# Altium PCB Quadruped_ShieldPCB.PcbDoc
Units mil, origin at the board's own origin, x right, y up, seen from the top; angles counter-clockwise.
Board outline 6290 x 3672.85 mil, 2 copper layers (Top Layer, Bottom Layer); 49 components, 68 nets, 491 pads, 53 vias.
Unrouted connection lines stored in the file: 4.
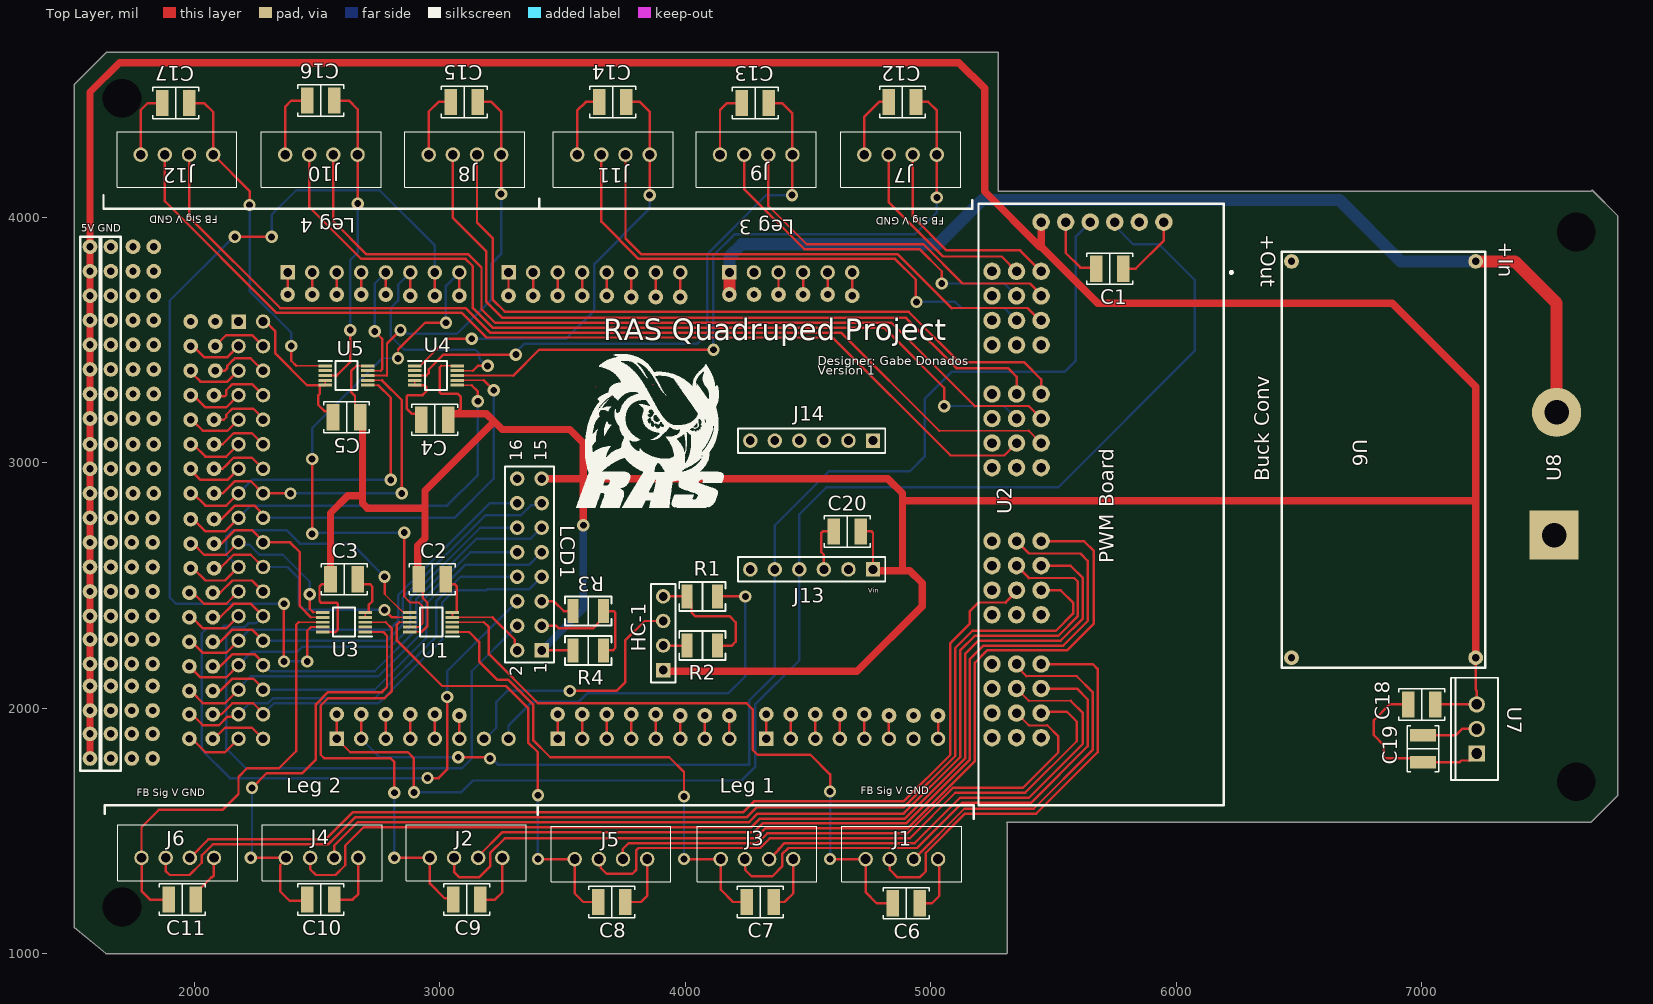
[diagram p0: Top Layer view]
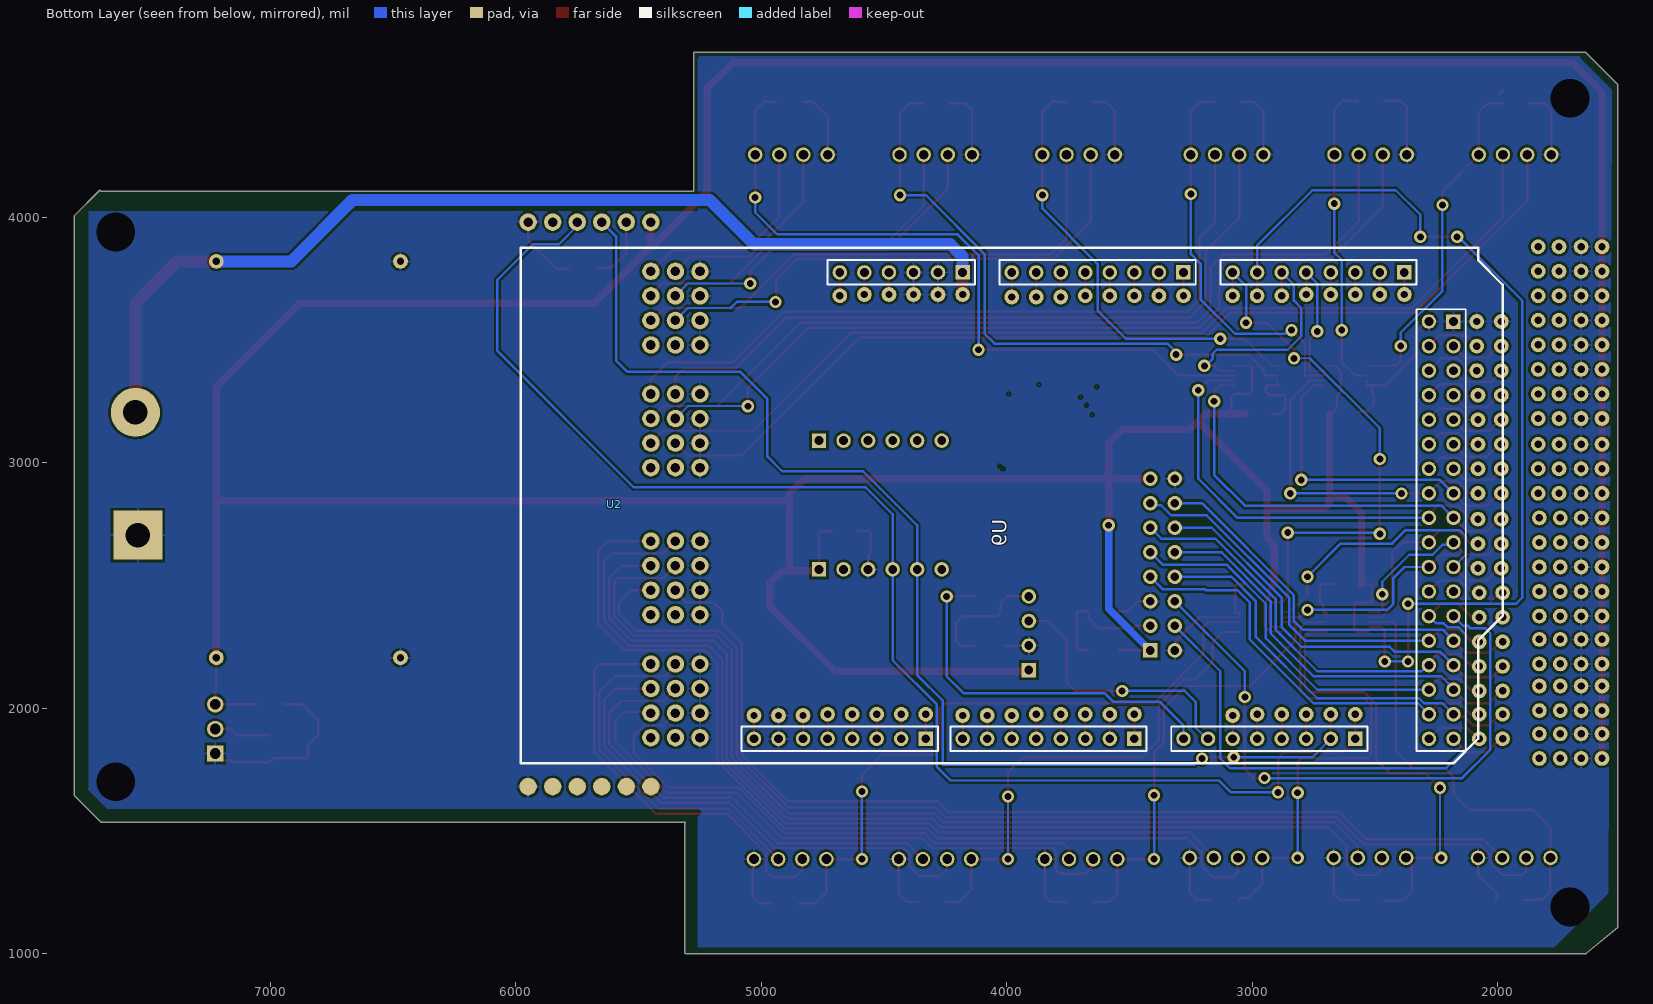
[diagram p1: Bottom Layer view, seen from below]
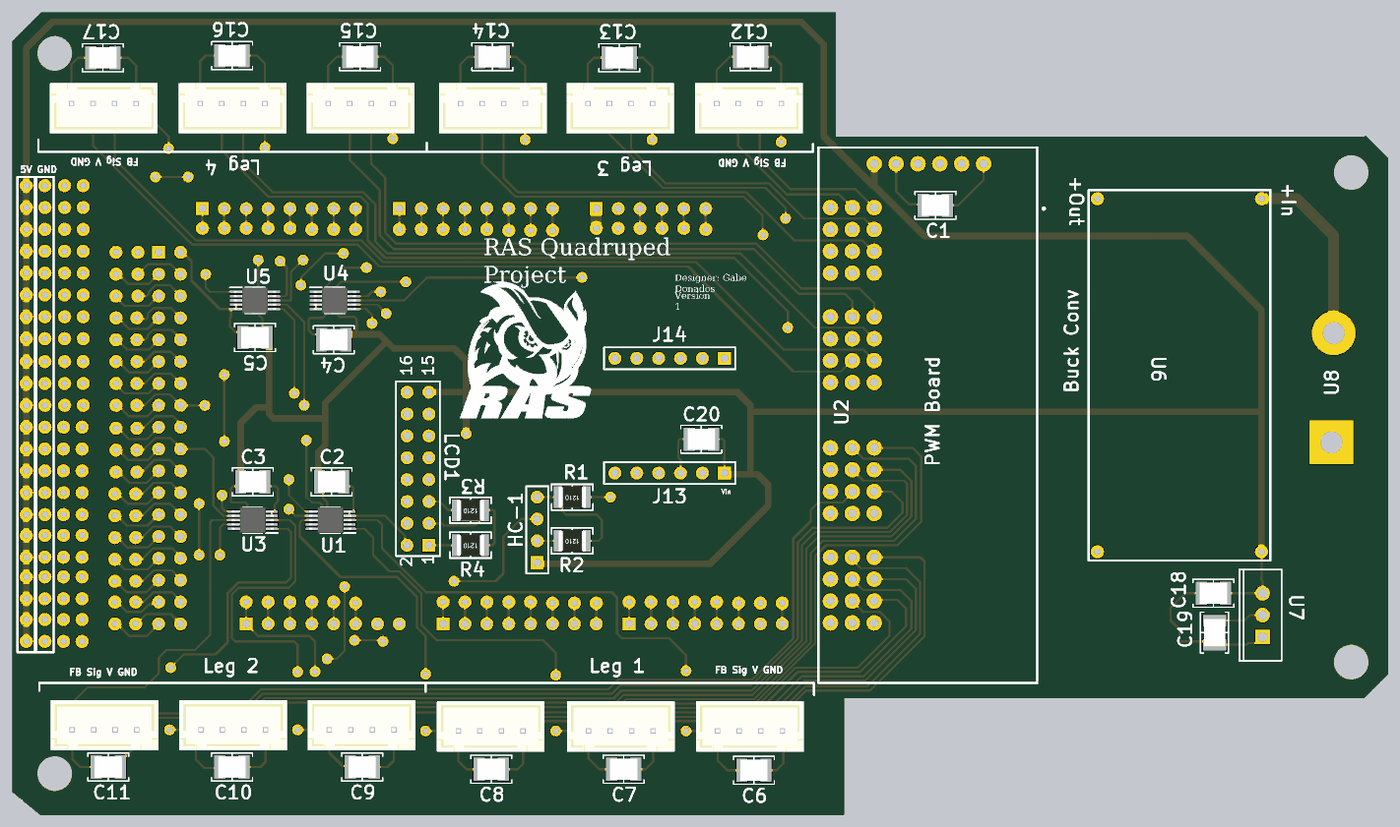
[diagram p2: 3D render of the assembled board from above, using the file's embedded part models]

## Layer stack, top to bottom
Top Solder: solder mask 0.4, Solder Resist, Dk 3.5
Top Layer: signal copper 1.4
Dielectric 1: dielectric 12.6, FR-4, Dk 4.8
Bottom Layer: signal copper 1.4
Bottom Solder: solder mask 0.4, Solder Resist, Dk 3.5

## Board outline
1510,4540 1642.85,4672.85 5275,4672.85 5275,4105 7690,4105 7695,4110 7800,4005 7800,1645 7690,1535 5310,1535 5312.35,1532.65 5312.35,1003.35 5310,1000 1640,1000 1510,1106.67 1510,1270

## Design rules (kind name [scope] priority, off if disabled: settings)
Clearance [All] p1: gap=10 ignorepadtopadclearanceinfootprint=TRUE except(0: Arc-Hole Track-Hole SMDPad-Hole THPad-Hole Via-Hole Fill-Hole Poly-Hole Region-Hole Text-Hole)
ComponentClearance [All] p1: gap=5 collisioncheckmode=3 verticalgap=0 showdistances=FALSE donotcheckwithout3dbody=TRUE
NetAntennae [All] p1: netantennaetolerance=5000
PolygonConnect [All] p1: connectstyle=Relief reliefconductorwidth=10 reliefentries=4 polygonreliefangle="90 Angle" airgapwidth=10
RoomDefinition U_HC06_Schem [InComponentClass('U_HC06_Schem')] p1: confinementstyle=ConfineIn formatcopy=TRUE lockcomponents=FALSE outline 3765,2060 4275,2060 4275,2565 3765,2565
RoomDefinition U_LCD_Schem [InComponentClass('U_LCD_Schem')] p2: confinementstyle=ConfineIn formatcopy=TRUE lockcomponents=FALSE outline 3135,2100 3735,2100 3735,3090 3135,3090
RoomDefinition U_Power_Circuit [InComponentClass('U_Power_Circuit')] p3: confinementstyle=ConfineIn formatcopy=TRUE lockcomponents=FALSE outline 7730.24,1655 7730.24,3995 6290.24,3995 6290.24,1655
RoutingVias [All] p1: holewidth=28 width=50 viastyle="Through Hole" minholewidth=28 minwidth=50 maxholewidth=28 maxwidth=50
ShortCircuit [All] p1: allowed=TRUE
SilkToSolderMaskClearance [IsText] p1: minsilkscreentomaskgap=5 clearancetoexposedcopper=TRUE
SolderMaskExpansion [All] p1: expansion=4 istentingtop=FALSE
UnRoutedNet [All] p1: checkbadconnections=TRUE
Width [All] p1: maxlimit=50 minlimit=5 preferedwidth=10
25 further rules are at their usual default settings.

## Classes and differential pairs
component class U_PWM_BoardSchem: C1 C2 C3 C4 C5 C6 C7 C8 C9 C10 C11 C12 C13 C14 C15 C16 C17 J1 J2 J3 J4 J5 J6 J7 J8 J9 J10 J11 J12 U1 U2 U3 U4 U5
component class U_Power_Circuit: C18 C19 U6 U7 U8
component class U_MPU_Schem: C20 J13 J14
component class U_LCD_Schem: LCD1 R3 R4
component class U_HC06_Schem: HC-1 R1 R2
component class Main_Board: U9

## Components (designator, comment, footprint, x,y, rotation, side; value= is the part's Value field where it differs from the comment)
C1 "0.1 µF" "CAP 1210_3225 - 1MM" 5730,3790 r180 top
C2 "0.1 µF" "CAP 1210_3225 - 1MM" 2970,2525 r180 top
C3 "0.1 µF" "CAP 1210_3225 - 1MM" 2610,2525 r180 top
C4 "0.1 µF" "CAP 1210_3225 - 1MM" 2980,3175 r0 top
C5 "0.1 µF" "CAP 1210_3225 - 1MM" 2620,3185 r0 top
C6 "0.1 µF" "CAP 1210_3225 - 1MM" 4900,1205 r180 top
C7 "0.1 µF" "CAP 1210_3225 - 1MM" 4305,1210 r180 top
C8 "0.1 µF" "CAP 1210_3225 - 1MM" 3700,1210 r180 top
C9 "0.1 µF" "CAP 1210_3225 - 1MM" 3110,1220 r180 top
C10 "0.1 µF" "CAP 1210_3225 - 1MM" 2515,1220 r180 top
C11 "0.1 µF" "CAP 1210_3225 - 1MM" 1950,1220 r180 top
C12 "0.1 µF" "CAP 1210_3225 - 1MM" 4885,4470 r0 top
C13 "0.1 µF" "CAP 1210_3225 - 1MM" 4285,4465 r0 top
C14 "0.1 µF" "CAP 1210_3225 - 1MM" 3705,4470 r0 top
C15 "0.1 µF" "CAP 1210_3225 - 1MM" 3100,4470 r0 top
C16 "0.1 µF" "CAP 1210_3225 - 1MM" 2515,4475 r0 top
C17 "0.1 µF" "CAP 1210_3225 - 1MM" 1925,4465 r0 top
C18 "0.33 µF" "CAP 1210_3225 - 1MM" 7000.12,2015 r0 top
C19 "0.1 µF" "CAP 1210_3225 - 1MM" 7005.24,1835 r90 top
C20 "0.1 µF" "CAP 1210_3225 - 1MM" 4660,2720 r0 top
HC-1 "Header 4" HDR1X4 3910,2155 r90 top
J1 "B4B-XH-A_LF__SN_" B4BXHALFSN 4734.72,1385 r0 top
J2 "B4B-XH-A_LF__SN_" B4BXHALFSN 2959.72,1390 r0 top
J3 "B4B-XH-A_LF__SN_" B4BXHALFSN 4144.72,1385 r0 top
J4 "B4B-XH-A_LF__SN_" B4BXHALFSN 2373.15,1390 r0 top
J5 "B4B-XH-A_LF__SN_" B4BXHALFSN 3549.72,1385 r0 top
J6 "B4B-XH-A_LF__SN_" B4BXHALFSN 1784.72,1390 r0 top
J7 "B4B-XH-A_LF__SN_" B4BXHALFSN 5025.28,4255 r180 top
J8 "B4B-XH-A_LF__SN_" B4BXHALFSN 3250,4255 r180 top
J9 "B4B-XH-A_LF__SN_" B4BXHALFSN 4436.85,4255 r180 top
J10 "B4B-XH-A_LF__SN_" B4BXHALFSN 2665,4255 r180 top
J11 "B4B-XH-A_LF__SN_" B4BXHALFSN 3855,4255 r180 top
J12 "B4B-XH-A_LF__SN_" B4BXHALFSN 2076.85,4255 r180 top
J13 "" HDR1X6 4765,2565 r180 top
J14 "" HDR1X6 4765,3090 r180 top
LCD1 "Header 8X2" HDR2X8 3415,2235 r90 top
R1 "1 kOhms" "RES 1210_3225" 4070,2455 r180 top
R2 "1 kOhms" "RES 1210_3225" 4070,2255 r180 top
R3 "1 kOhms" "RES 1210_3225" 3605,2395 r180 top
R4 "47 kOhms" "RES 1210_3225" 3605,2235 r180 top
U1 "MAX4524LEUB+" SOP50P490X110-10N 2965,2350 r180 top
U2 "815" 815 5194.88,4055.2 r270 top
U3 "MAX4524LEUB+" SOP50P490X110-10N 2610,2350 r180 top
U4 "MAX4524LEUB+" SOP50P490X110-10N 2985,3355 r0 top
U5 "MAX4524LEUB+" SOP50P490X110-10N 2620,3355 r0 top
U6 "DC-DC Buck Converter Breakout" "DC-DC Buck Converter Breakout-Footprint-1" 6635.24,3045 r270 top
U7 "LD1117" "PCB - LEADED - TO - TO-220" 7225,1915 r180 top
U8 "3S LiPo Input" "3S LiPo Input-Footprint-2" 7545,2955 r90 top
U9 "ARDUINO MEGA" "ARDUINO MEGA" 3880,2775 r180 bottom locked

## Footprints (in the part's own frame and the unit in brackets; to place one, negate y for a bottom-side part, rotate by r counter-clockwise, add the part's x,y. Pads: shape width x height; smd on the part's side, far side on the other; paste and mask are expansions set on the pad)
"3S LiPo Input-Footprint-2" [mil]
  round 200 hole 100: 1(250,-5)
  rect 200x200 hole 100: 2(-250,5)
815 [mm]
  round 1.8 hole 1: 1(7,6.48) 2(9.54,6.48) 3(12.08,6.48) 4(14.62,6.48) 5(19.7,6.48) 6(22.24,6.48) 7(24.78,6.48) 8(27.32,6.48) 9(34.92,6.48) 10(37.46,6.48) 11(40,6.48) 12(42.54,6.48) 13(47.64,6.48) 14(50.18,6.48) 15(52.72,6.48) 16(55.26,6.48) 17(7,3.94) 18(9.54,3.94) 19(12.08,3.94) 20(14.62,3.94) 21(19.7,3.94) 22(22.24,3.94) 23(24.78,3.94) 24(27.32,3.94) 25(34.92,3.94) 26(37.46,3.94) 27(40,3.94) 28(42.54,3.94) 29(47.64,3.94) 30(50.18,3.94) 31(52.72,3.94) 32(55.26,3.94) 33(7,1.4) 34(9.54,1.4) 35(12.08,1.4) 36(14.62,1.4) 37(19.7,1.4) 38(22.24,1.4) 39(24.78,1.4) 40(27.32,1.4) 41(34.92,1.4) 42(37.46,1.4) 43(40,1.4) 44(42.54,1.4) 45(47.64,1.4) 46(50.18,1.4) 47(52.72,1.4) 48(55.26,1.4) 49(1.91,6.48) 50(1.91,9.02) 51(1.91,11.56) 52(1.91,14.1) 53(1.91,16.64) 54(1.91,19.18)
  round 1.8 smd far side: 55(60.33,6.48) 56(60.33,9.02) 57(60.33,11.56) 58(60.33,14.1) 59(60.33,16.64) 60(60.33,19.18)
  silkscreen extent 0,0 62.24,26.29
"ARDUINO MEGA" [mm] "Arduino Mega 2560"
  rect 1.5x1.5 hole 0.9: 0(10.16,-22.86) 8(-11.43,-22.86) 21(33.02,-22.86) 59(-7.62,25.4) 67(15.24,25.4) 75(38.1,25.4) 79(43.18,20.32)
  round 1.5 hole 0.9: 1(7.62,-22.86) 2(5.08,-22.86) 3(2.54,-22.86) 4(0,-22.86) 5(-2.54,-22.86) 6(-5.08,-22.86) 7(-7.62,-22.86) 9(-13.97,-22.86) 10(-16.51,-22.86) 11(-19.05,-22.86) 12(-21.59,-22.86) 13(-24.13,-22.86) 14(15.24,-22.86) 15(17.78,-22.86) 16(20.32,-22.86) 17(22.86,-22.86) 18(25.4,-22.86) 19(27.94,-22.86) 20(30.48,-22.86) 22(40.64,-20.32) 23(43.18,-20.32) 24(40.64,-17.78) 25(43.18,-17.78) 26(40.64,-15.24) 27(43.18,-15.24) 28(40.64,-12.7) 29(43.18,-12.7) 30(40.64,-10.16) 31(43.18,-10.16) 32(40.64,-7.62) 33(43.18,-7.62) 34(40.64,-5.08) 35(43.18,-5.08) 36(40.64,-2.54) 37(43.18,-2.54) 38(40.64,0) 39(43.18,0) 40(40.64,2.54) 41(43.18,2.54) 42(40.64,5.08) 43(43.18,5.08) 44(40.64,7.62) 45(43.18,7.62) 46(40.64,10.16) 47(43.18,10.16) 48(40.64,12.7) 49(43.18,12.7) 50(40.64,15.24) 51(43.18,15.24) 52(40.64,17.78) 53(43.18,17.78) 54(-20.32,25.4) 55(-17.78,25.4) 56(-15.24,25.4) 57(-12.7,25.4) 58(-10.16,25.4) 60(-2.54,25.4) 61(0,25.4) 62(2.54,25.4) 63(5.08,25.4) 64(7.62,25.4) 65(10.16,25.4) 66(12.7,25.4) 68(20.32,25.4) 69(22.86,25.4) 70(25.4,25.4) 71(27.94,25.4) 72(30.48,25.4) 73(33.02,25.4) 74(35.56,25.4) 76(-26.67,-22.86) 77(-29.21,-22.86) 78(40.64,20.32) 80(43.18,-22.86) 81(40.64,-22.86)
  silkscreen extent -53.34,-25.4 48.26,27.94
B4BXHALFSN [mm]
  round 1.5 hole 1: 1(0,0) 2(2.5,0) 3(5,0) 4(7.5,0)
  silkscreen extent -2.45,-2.35 9.95,3.4, body extent -2.45,-2.35 9.95,3.4, height 7.52
"CAP 1210_3225 - 1MM" [mm] "Chip Capacitor, 2-Leads, Body 3.20x2.50mm, IPC Medium Density"
  rect 1.3x2.7 smd: 1(-1.4,0) 2(1.4,0)
  silkscreen extent -2.37,-1.63 2.37,1.63, body extent -1.6,-1.25 1.6,1.25, height 1
"DC-DC Buck Converter Breakout-Footprint-1" [mil]
  round 60 hole 30: 1(-775,585) 2(-775,-165) 3(840,585) 4(840,-165)
  silkscreen extent -815,-205 880,625
HDR1X4 [mm] "Connector; Header; 4 Position"
  rect 1.5x1.5 hole 0.9: 1(0,0)
  round 1.5 hole 0.9: 2(2.54,0) 3(5.08,0) 4(7.62,0)
  silkscreen extent -1.27,-1.27 8.89,1.27
HDR1X6 [mm] "Connector; Header; 6 Position"
  rect 1.5x1.5 hole 0.9: 1(0,0)
  round 1.5 hole 0.9: 2(2.54,0) 3(5.08,0) 4(7.62,0) 5(10.16,0) 6(12.7,0)
  silkscreen extent -1.27,-1.27 13.97,1.27
HDR2X8 [mm] "Connector; Header; 8x2 Position"
  rect 1.5x1.5 hole 0.9: 1(0,0)
  round 1.5 hole 0.9: 2(0,2.54) 3(2.54,0) 4(2.54,2.54) 5(5.08,0) 6(5.08,2.54) 7(7.62,0) 8(7.62,2.54) 9(10.16,0) 10(10.16,2.54) 11(12.7,0) 12(12.7,2.54) 13(15.24,0) 14(15.24,2.54) 15(17.78,0) 16(17.78,2.54)
  silkscreen extent -1.27,-1.27 19.05,3.81
"PCB - LEADED - TO - TO-220" [mm]
  rect 1.7x1.7 hole 1.1: 1(0,2.54)
  round 1.7 hole 1.1: 2(0,0) 3(0,-2.54)
  silkscreen extent -2.21,-5.3 2.69,5.3, body extent -2.19,-5.28 2.66,5.28, height 19.85
"RES 1210_3225" [mm] "Chip Resistor, 2-Leads, Body 3.1x2.6mm, IPC Medium Density"
  rect 1.15x2.5 smd: 1(-1.575,0) 2(1.575,0)
  silkscreen extent -2.4,-1.5 2.4,1.5, body extent -1.6,-1.25 1.6,1.25, height 0.7
SOP50P490X110-10N [mm]
  rect 1.4x0.3 smd: 1(-2.2,1) 2(-2.2,0.5) 3(-2.2,0) 4(-2.2,-0.5) 5(-2.2,-1) 6(2.2,-1) 7(2.2,-0.5) 8(2.2,0) 9(2.2,0.5) 10(2.2,1)
  silkscreen extent -2.9,-1.5 1.15,1.5, body extent -2.45,-1.5 2.45,1.5, height 1.1

## Part data
C1 C2 C3 C4 C5 C6 C7 C8 C9 C10 C11 C12 C13 C14 C15 C16 C17 C19 C20: library part C1210C104J5GACAUTO, "CAP CER 0.1UF 50V C0G/NP0 1210", Device Package="1210 (3225 Metric)", Manufacturer=KEMET, Operating Temperature="-55°C ~ 125°C", Ratings=AEC-Q200, Supplier Part Number 1=399-15804-1-ND, Temperature Coefficient="C0G, NP0", Tolerance=±5%, Voltage - Rated=50V, Applications=Automotive, Capacitance="0.1 µF", ComponentLink1Description=Datasheet, ComponentLink1URL=https://api.kemet.com/component-edge/download/datasheet/C1210C104J5GACAUTO.pdf, ComponentLink2Description="DigiKey Link", ComponentLink2URL=https://www.digikey.com/en/products/detail/kemet/C1210C104J5GACAUTO/7516038, Features="Low ESL", LastUpdated="9/19/2022 1:23:33 PM", Lifecycle Status=Active, Minimum Order=1, Mounting Type="Surface Mount, MLCC", Package / Case="1210 (3225 Metric)", Packaging=TapeAndReel, Part Number=C1210C104J5GACAUTO, Part Status=Active, partid=43680, Price=0.54, Series="SMD Auto C0G", Size / Dimension="0.126\" L x 0.098\" W (3.20mm x 2.50mm)", Supplier 1=DigiKey, Thickness (Max)="0.055\" (1.40mm)"
C18: library part C1210C334J3RAC7800, "CAP CER 0.33UF 25V X7R 1210", Device Package="1210 (3225 Metric)", Manufacturer=KEMET, Operating Temperature="-55°C ~ 125°C", Supplier Part Number 1=399-17497-1-ND, Temperature Coefficient=X7R, Tolerance=±5%, Voltage - Rated=25V, Applications="Bypass, Decoupling", Capacitance="0.33 µF", ComponentLink1Description=Datasheet, ComponentLink1URL=https://api.kemet.com/component-edge/download/datasheet/C1210C334J3RACTU.pdf, ComponentLink2Description="DigiKey Link", ComponentLink2URL=https://www.digikey.com/en/products/detail/kemet/C1210C334J3RAC7800/2216802, LastUpdated="9/19/2022 1:23:31 PM", Lifecycle Status=Active, Minimum Order=1, Mounting Type="Surface Mount, MLCC", Package / Case="1210 (3225 Metric)", Packaging=TapeAndReel, Part Number=C1210C334J3RAC7800, Part Status=Active, partid=25129, Price=0.39, Series="SMD Comm X7R", Size / Dimension="0.126\" L x 0.098\" W (3.20mm x 2.50mm)", Supplier 1=DigiKey, Thickness (Max)="0.041\" (1.05mm)"
HC-1: "Header, 4-Pin", LatestRevisionDate=17-Jul-2002, LatestRevisionNote="Re-released for DXP Platform.", Publisher="Altium Limited"
J1 J2 J3 J4 J5 J6 J7 J8 J9 J10 J11 J12: "Connector", Arrow Part Number=B4B-XH-A(LF)(SN), Manufacturer_Name="JST (JAPAN SOLDERLESS TERMINALS)", Arrow Price/Stock=https://www.arrow.com/en/products/b4b-xh-a-lf-sn/jst-manufacturing, Datasheet Link=https://datasheet.lcsc.com/szlcsc/JST-Sales-America-B4B-XH-A-LF-SN_C144395.pdf, Height=7mm, Manufacturer_Part_Number=B4B-XH-A(LF)(SN)
J13 J14: library part "Header 6", "Header, 6-Pin", LatestRevisionDate=17-Jul-2002, LatestRevisionNote="Re-released for DXP Platform.", Publisher="Altium Limited"
LCD1: "Header, 8-Pin, Dual row", LatestRevisionDate=17-Jul-2002, LatestRevisionNote="Re-released for DXP Platform.", Publisher="Altium Limited"
R1 R2 R3: library part ESR25JZPJ102, "RES SMD 1K OHM 5% 2/3W 1210", Device Package="1210 (3225 Metric)", Manufacturer="Rohm Semiconductor", Operating Temperature="-55°C ~ 155°C", Power (Watts)="0.667W, 2/3W", Ratings=AEC-Q200, Supplier Device Package=1210, Supplier Part Number 1=RHM1.0KAXCT-ND, Temperature Coefficient=±200ppm/°C, Tolerance=±5%, ComponentLink1Description=Datasheet, ComponentLink1URL=https://www.rohm.com/datasheet/ESR01MZPF/esr-e, ComponentLink2Description="DigiKey Link", ComponentLink2URL=https://www.digikey.com/en/products/detail/rohm-semiconductor/ESR25JZPJ102/2288498, Composition="Thick Film", Features="Automotive AEC-Q200, Pulse Withstanding", Height - Seated (Max)="0.026\" (0.65mm)", LastUpdated="9/19/2022 2:02:25 PM", Lifecycle Status=Active, Minimum Order=1, Number of Terminations=2, Package / Case="1210 (3225 Metric)", Packaging=TapeAndReel, Part Number=ESR25JZPJ102, Part Status=Active, Price=0.05, Resistance="1 kOhms", Series=ESR, Size / Dimension="0.126\" L x 0.098\" W (3.20mm x 2.50mm)", Supplier 1=DigiKey
R4: library part CRGP1210F47K, "RES 47K OHM 1% 3/4W 1210", Device Package="1210 (3225 Metric)", Manufacturer="TE Connectivity Passive Product", Operating Temperature="-55°C ~ 155°C", Power (Watts)="0.75W, 3/4W", Supplier Device Package=1210, Supplier Part Number 1=A130619CT-ND, Temperature Coefficient=±100ppm/°C, Tolerance=±1%, ComponentLink1Description=Datasheet, ComponentLink1URL=https://www.te.com/commerce/DocumentDelivery/DDEController?Action=srchrtrv&DocNm=9-1773463-9&DocType=DS&DocLang=English, ComponentLink2Description="DigiKey Link", ComponentLink2URL=https://www.digikey.com/en/products/detail/te-connectivity-passive-product/CRGP1210F47K/8577221, Composition="Thick Film", Features="Pulse Withstanding", Height - Seated (Max)="0.026\" (0.65mm)", LastUpdated="9/19/2022 2:02:30 PM", Lifecycle Status=Active, Minimum Order=1, Number of Terminations=2, Package / Case="1210 (3225 Metric)", Packaging=TapeAndReel, Part Number=CRGP1210F47K, Part Status=Active, Price=0.04, Resistance="47 kOhms", Series=CRGP, Size / Dimension="0.122\" L x 0.102\" W (3.10mm x 2.60mm)", Supplier 1=DigiKey
U1 U3 U4 U5: "Integrated Circuit", Manufacturer_Name="Maxim Integrated", Mouser Part Number=700-MAX4524LEUB+, Datasheet Link=https://datasheets.maximintegrated.com/en/ds/MAX4524L-MAX4525L.pdf, Height=1.1mm, Manufacturer_Part_Number=MAX4524LEUB+, Mouser Price/Stock=https://www.mouser.co.uk/ProductDetail/Maxim-Integrated/MAX4524LEUB%2b?qs=Mc2rGIXtnyWlO7eYhLJKZQ%3D%3D
U2: "Undefined or Miscellaneous", Manufacturer_Name=Adafruit, Mouser Part Number=485-815, Arrow Part Number=815, Arrow Price/Stock=https://www.arrow.com/en/products/815/adafruit-industries, Datasheet Link=https://cdn-shop.adafruit.com/datasheets/PCA9685.pdf, Manufacturer_Part_Number=815, Mouser Price/Stock=https://www.mouser.co.uk/ProductDetail/Adafruit/815?qs=GURawfaeGuCGKbWyy9179Q%3D%3D
U6: library part CMP-00001-3
U7: library part 776, "Linear Voltage Regulator IC  1 Output  1A TO-220AB", Dropout Voltage="1.3V @ 1A", Manufacturer=STMicroelectronics, Manufacturer part number=LD1117AV33, Output Current=1A, Package=TO-220-3, Supplier Part Number 1=497-1485-5-ND, Voltage - Input (Max)=15V, Voltage - Output (Max)=-, Voltage - Output (Min or Fixed)=3.3V, Base Part Number=LD1117, Category="Linear Regulators", Datasheet=http://www.st.com/content/ccc/resource/technical/document/datasheet/a5/c3/3f/c9/2b/15/40/49/CD00002116.pdf/files/CD00002116.pdf/jcr:content/translations/en.CD00002116.pdf, Name="LD1117 - 3.3V Linear Regulator", Output Configuration=Positive, Output Type=Fixed, Packaging=Tube, Rowan Part Number=776, Status=Active, Supplier 1=Digi-Key, Type="Linear Regulator"
U8: library part CMP-00000-1

## Free pads (board coordinates)
  round 60 hole 30: 37(1575,1795) 37(1575,1990) 37(1575,2180) 37(1575,2375) 37(1575,3180) 37(1660,1795) 37(1660,1990) 37(1660,2180) 37(1660,2375) 37(1660,3180) 37(1745,1795) 37(1745,1990) 37(1745,2180) 37(1745,2375) 37(1750,3180) 37(1830,1795) 37(1830,1990) 37(1830,2180) 37(1830,2375) 37(1835,3180) 37(1980,1875) 37(1980,2070) 37(1985,2875) 37(2075,1875) 37(2075,2070) 37(2080,2875) 37(2380,3685) 37(2580,1975) 37(3280,3680) 37(3480,1975) 37(4180,3685) 37(4330,1975) 39(1575,1895) 39(1575,2090) 39(1575,2280) 39(1575,2475) 39(1575,3280) 39(1660,1895) 39(1660,2090) 39(1660,2280) 39(1660,2475) 39(1660,3280) 39(1745,1895) 39(1745,2090) 39(1745,2280) 39(1745,2475) 39(1750,3280) 39(1830,1895) 39(1830,2090) 39(1830,2280) 39(1830,2475) 39(1835,3280) 39(1980,1975) 39(1980,2170) 39(1985,2975) 39(2075,1975) 39(2075,2170) 39(2080,2975) 39(2480,3685) 39(2680,1975) 39(3380,3680) 39(3580,1975) 39(4280,3685) 39(4430,1975) 40(1575,2575) 40(1575,3380) 40(1660,2575) 40(1660,3380) 40(1745,2575) 40(1750,3380) 40(1830,2575) 40(1835,3380) 40(1980,2270) 40(1985,3075) 40(2075,2270) 40(2080,3075) 40(2580,3685) 40(2780,1975) 40(3480,3680) 40(3680,1975) 40(4380,3685) 40(4530,1975) 41(1575,2675) 41(1575,3480) 41(1660,2675) 41(1660,3480) 41(1745,2675) 41(1750,3480) 41(1830,2675) 41(1835,3480) 41(1980,2370) 41(1985,3175) 41(2075,2370) 41(2080,3175) 41(2680,3685) 41(2880,1975) 41(3580,3680) 41(3780,1975) 41(4480,3685) 41(4630,1975) 42(1575,2775) 42(1575,3580) 42(1660,2775) 42(1660,3580) 42(1745,2775) 42(1750,3580) 42(1830,2775) 42(1835,3580) 42(1980,2470) 42(1985,3275) 42(2075,2470) 42(2080,3275) 42(2780,3685) 42(2980,1975) 42(3680,3680) 42(3880,1975) 42(4580,3685) 42(4730,1975) 43(1575,2875) 43(1575,3680) 43(1660,2875) 43(1660,3680) 43(1750,2875) 43(1750,3680) 43(1835,2875) 43(1835,3680) 43(1985,2570) 43(1985,3375) 43(2080,2570) 43(2085,3375) 43(2880,3680) 43(3080,1970) 43(3780,3675) 43(3980,1970) 43(4680,3680) 43(4830,1970) 44(1575,2975) 44(1575,3780) 44(1660,2975) 44(1660,3780) 44(1750,2975) 44(1750,3780) 44(1835,2975) 44(1835,3780) 44(1985,2670) 44(1985,3475) 44(2080,2670) 44(2085,3475) 44(2980,3680) 44(3880,3675) 44(4080,1970) 44(4930,1970) 45(1575,3075) 45(1575,3880) 45(1660,3075) 45(1660,3880) 45(1750,3075) 45(1750,3880) 45(1835,3075) 45(1835,3880) 45(1985,2770) 45(1985,3575) 45(2080,2770) 45(2085,3575) 45(3080,3680) 45(3980,3675) 45(4180,1970) 45(5030,1970)
  round 10 hole 158: 46(7630,3940)
  round 60 hole 158: 47(1705,1190) 47(1705,4485) 47(7630,1700)

## Via types
v1: diameter 50, hole 28, Top Layer to Bottom Layer, 53 vias

## Nets (pads, with @x,y where several pads share a name; then routed paths per layer and width w, separated by ;. In a path a pad name is that pad's centre, name@x,y a point inside that pad or via, vN(x,y) a via of type N, cw(c..) or ccw(c..) an arc to the next point about the centre after c; other vN are vias at no path point)
3.3V: C19.2 U7.2 | length 230.1
  Top Layer w10: C19.2 7140.12,1890.12 7165,1915 U7.2
+5: C1.2 C2.2 C3.2 C4.2 C5.2 C18.2 C20.2 HC-1.1 J13.1 LCD1.1 LCD1.15 R4.2 U1.10 U2.49 U2.50 U3.10 U4.10 U5.10 U6.3 U7.3 | length 21639
  Top Layer w6: U4.10@3055.98,3395 3070.98,3395 U4.10
  Top Layer w7: U3.10 2524.02,2310 2575,2310 ; 2660,3395 2705.98,3395 U5.10 ; U1.10 2925.63,2310.63 ; 3005.86,3395 U4.10@3055.98,3395
  Top Layer w10: C3.2@2554.76,2505 2520,2505 2510,2495 2510,2435.86 2515.86,2430 2579.14,2430 2585,2424.14 2585,2320 2575,2310 ; 2660,3395 2640,3375 2640,3285.86 2654.53,3271.33 2654.53,3225.59 C5.2@2675.12,3205 ; C5.2 C5.2@2685,3175.12 ; C2.2@2909.88,2505 2930.47,2484.41 2930.47,2448.99 2950,2429.46 2950,2335 2925.63,2310.63 ; 3005.86,3395 3000,3389.14 3000,3285.86 3005.86,3280 3074.14,3280 3085,3269.14 3085,3220 3065,3200 ; LCD1.1 R4.2 ; C20.2 4759.14,2720 4765,2714.14 J13.1 ; U2.50 5550,3855 5610,3795 5669.88,3795 C1.2 ; C18.2 U7.3 7225,2070 7220,2075 7220,2085 7220.24,2085.24 U6.3
  Top Layer w30: 1575,1795 1575,4510 1695,4630 5115,4630 5220,4525 5220,4105 5445,3880 5450,3880 ; C3.2@2554.76,2505 2554.76,2794.76 2625,2865 2685,2865 ; C5.2@2685,3195.12 2685,3175.12 2685,2865 ; C2.2@2909.88,2505 2909.88,2661.22 2940,2691.34 2940,2815 ; C4.2@3030.12,3200 3065,3200 3190,3200 3222.5,3167.5 ; LCD1.15 3585,2935 ; v1(3585,2745) 3585,2935 ; HC-1.1 3915,2150 4700,2150 4965,2415 4965,2510 4915,2560 4880,2560 ; J13.1 4770,2560 4880,2560 ; U2.49 5450,3880 ; U6.3 7220.24,2845 ; 2685,2865 2685,2835 2705,2815 2940,2815 ; 2940,2815 2940,2885 3222.5,3167.5 ; 3222.5,3167.5 3255,3135 3530,3135 3585,3080 3585,2935 ; 3585,2935 4825,2935 4885,2875 4885,2845 ; 4880,2560 4885,2565 4885,2845 ; 4885,2845 7220.24,2845 ; 5450,3880 5680,3650 6880,3650 7220.24,3309.76 7220.24,2845
  Bottom Layer w30: LCD1.1 3585,2405 v1(3585,2745)
+12: U6.1 U8.1 U9.59 | length 4149.2
  Top Layer w50: U6.1 7380,3820 7550,3650 U8.1
  Bottom Layer w50: U9.59 4180.06,3775.06 4180.06,3840.06 4230,3890 5030,3890 5210,4070 6665,4070 6915,3820 U6.1
D0: LCD1.7 U9.22 | length 1700
  Top Layer w10: 2075,1975 2110,1975 2155,2020 2240,2020 2280,1980 U9.22
  Bottom Layer w10: U9.22 2325,2020 2750,2020 3010,2280 3010,2430 3060,2480 3190,2480 3195,2485 3365,2485 LCD1.7
D1: LCD1.8 U9.23 | length 1679.2
  Top Layer w10: 1990,1975 2035,1930 2100,1930 2135.61,1965.61 2170.61,1965.61 U9.23
  Bottom Layer w10: U9.23 2225,2020 2300,2020 2320,2040 2735,2040 2985,2290 2985,2435 3085,2535 LCD1.8
D2: LCD1.9 U9.24 | length 1696.2
  Top Layer w10: 2075,2070 2105,2070 2155,2120 2240,2120 2280,2080 U9.24
  Bottom Layer w10: U9.24 2735,2075 2945,2285 2945,2425 3105,2585 3365,2585 LCD1.9
D3: LCD1.10 U9.25 | length 1682.5
  Top Layer w10: 1990,2070 1990,2065 2035,2020 2125,2020 U9.25
  Bottom Layer w10: U9.25 2180,2080 2230,2130 2750,2130 2925,2305 2925,2435 3125,2635 LCD1.10
D4: LCD1.11 U9.26 | length 1711.1
  Top Layer w10: 2075,2170 2105,2170 2155,2220 2245,2220 2280,2185 U9.26
  Bottom Layer w10: U9.26 2284.69,2175 2309.69,2150 2735,2150 2905,2320 2905,2445 3150,2690 3370,2690 LCD1.11
D5: LCD1.12 U9.27 | length 1672.5
  Top Layer w10: 1990,2170 1990,2160 2025,2125 2130,2125 U9.27
  Bottom Layer w10: U9.27 2235,2230 2420,2230 2440,2250 2800,2250 2880,2330 2880,2450 3165,2735 LCD1.12
D6: LCD1.13 U9.28 | length 1675.7
  Top Layer w10: 2075,2270 2105,2270 2155,2320 2235,2320 U9.28
  Bottom Layer w10: U9.28 2785,2275 2850,2340 2850,2450 3185,2785 3330,2785 3370.61,2825.61 3405.61,2825.61 LCD1.13
D7: LCD1.14 U9.29 | length 1657.8
  Top Layer w10: 1990,2270 2035,2225 2130,2225 U9.29
  Bottom Layer w10: U9.29 2225,2320 2795,2320 2830,2355 2830,2460 3205,2835 LCD1.14
FB1_in: U1.9 U9.68 | length 2257.4
  Top Layer w7: v1(2830,3425) 2830.5,3425.5 2830.5,3460.5 ; 2855,2455 2880,2430 2915,2430 2930,2415 2930,2345.63 2914.68,2330.32 U1.9
  Top Layer w10: v1(2480,2710) v1(2480,3015) ; 2830.5,3460.5 2940,3570 v1(3025,3570) ; 2855,2455 v1(2855,2715)
  Bottom Layer w7: v1(2480,2710) v1@2485,2715 ; 2765,3425 v1(2830,3425)
  Bottom Layer w10: v1(2480,3015) 2480,3140 2765,3425 ; v1@2485,2715 v1(2855,2715) ; v1(3025,3570) 3025,3720 U9.68
FB2_in: U3.9 U9.69 | length 3737.4
  Top Layer w7: 2475.32,2330.32 U3.9
  Top Layer w10: v1(2165,3920) v1(2315,3920) ; v1(2365,2190) v1(2365,2425) ; v1(2460,2190) 2460,2315 2475.32,2330.32 ; U9.69@2980,3770 U9.69
  Bottom Layer w10: v1(2165,3920) 2160,3920 1900,3660 1900,2450 1925,2425 v1(2365,2425) ; v1(2315,3920) 2315,4010 2415,4110 2755,4110 2980,3885 U9.69 ; v1(2365,2190) v1(2460,2190)
FB3_in: U4.9 U9.70 | length 874.6
  Top Layer w7: U4.9 3134.68,3374.68
  Top Layer w10: 3134.68,3374.68 3154.46,3394.46 v1(3195,3394.46)
  Bottom Layer w10: U9.70 2830,3725 2830,3660 2800,3630 2800,3515 2855,3460 3145,3460 3161.17,3443.83 3161.17,3422.74 3185,3398.92 v1@3185,3394.46
FB4_in: U5.9 U9.71 | length 491.3
  Top Layer w7: U5.9 2759.14,3374.68
  Top Layer w10: v1(2735,3535) 2765,3505 2765,3380.54 2759.14,3374.68 ; U9.71@2775,3775 U9.71
  Bottom Layer w10: v1(2735,3535) 2735,3730 U9.71
GND: C1.1 C2.1 C3.1 C4.1 C5.1 C6.1 C7.1 C8.1 C9.1 C10.1 C11.1 C12.1 C13.1 C14.1 C15.1 C16.1 C17.1 C18.1 C19.1 C20.1 HC-1.2 J1.4 J2.4 J3.4 J4.4 J5.4 J6.4 J7.4 J8.4 J9.4 J10.4 J11.4 J12.4 J13.3 LCD1.2 LCD1.5 LCD1.16 pad.37@1660,1795 pad.37@1660,1990 pad.37@1660,2180 pad.37@1660,2375 pad.37@1660,3180 pad.39@1660,1895 pad.39@1660,2090 pad.39@1660,2280 pad.39@1660,2475 pad.39@1660,3280 pad.39@4280,3685 pad.40@1660,2575 pad.40@1660,3380 pad.40@4380,3685 pad.41@1660,2675 pad.41@1660,3480 pad.42@1660,2775 pad.42@1660,3580 pad.43@1660,2875 pad.43@1660,3680 pad.44@1660,2975 pad.44@1660,3780 pad.44@4930,1970 pad.45@1660,3075 pad.45@1660,3880 pad.45@1985,3575 pad.45@2085,3575 pad.46 pad.47 R2.2 R3.2 U1.4 U1.5 U2.33 U2.34 U2.35 U2.36 U2.37 U2.38 U2.39 U2.40 U2.41 U2.42 U2.43 U2.44 U2.45 U2.46 U2.47 U2.48 U2.54 U2.60 U3.4 U3.5 U4.4 U4.5 U5.4 U5.5 U6.2 U6.4 U7.1 U8.2 U9.57 U9.58 U9.76 U9.78 U9.79 | length 6329.2
  Top Layer w7: U5.5 U5.4 ; U3.4 U3.5 ; U4.5 U4.4 ; U1.5 U1.4 3215.32,2369.68
  Top Layer w10: J12.4 1781.57,4436.57 1810,4465 C17.1 ; C11.1 2005.12,1247.56 2025.71,1268.15 2026.93,1268.15 2068.78,1310 2071.22,1310 2080,1318.78 J6.4 ; U9.78 2290,3575 2330,3535 2330,3445 2459.37,3315.63 U5.5@2511.76,3315.63 ; J10.4 2369.72,4449.72 2395,4475 C16.1 ; U5.5 U5.5@2511.76,3315.63 ; C5.1@2564.88,3205 2560.03,3209.85 2530.15,3209.85 2505,3235 2505,3274.14 2510.86,3280 2510.86,3314.72 U5.5@2511.76,3315.63 ; C10.1 2645,1220 2668.43,1243.43 J4.4 ; C3.1@2665,2505 2715,2505 2725,2495 2725,2435 2710,2420 2710,2390.28 2709.09,2389.37 U3.5 ; U4.5@2888.39,3315.63 U4.5 2938.51,3315.63 2945,3309.14 2945,3290 2930,3275 2870.86,3275 2865,3269.14 2865,3220 2885,3200 C4.1@2919.88,3200 ; J8.4 2954.72,4429.72 2995,4470 C15.1 ; C2.1@3020.12,2505 3060,2505 3070,2495 3070,2390.28 3069.09,2389.37 U1.5 ; C9.1 3225,1220 3255,1250 J2.4 ; 3215.32,2369.68 3305.61,2279.39 3305.61,2244.39 LCD1.2 ; LCD1.5 3465,2435 3505,2395 R3.2 ; J11.4 3559.72,4434.72 3595,4470 C14.1 ; C8.1 3820,1210 3845,1235 J5.4 ; HC-1.2 R2.2 ; J9.4 4141.57,4436.57 4170,4465 C13.1 ; C7.1 4405,1210 4440.86,1245.86 4440.86,1258.67 4440,1259.53 J3.4 ; pad.40@4380,3685 U9.57 ; J13.3 4565,2625 4555,2635 4555,2714.14 4560.86,2720 C20.1 ; J7.4 4730,4410 4790,4470 C12.1 ; C6.1 5005,1205 5035,1235 5035,1380 J1.4 ; C1.1 5835,3790 5950,3905 U2.54 ; C18.1 6870,2015 6805,1950 6805,1890 6845,1850 6845,1800.86 6850.86,1795 6990.12,1795 C19.1 7154.88,1779.88 7161.54,1786.54 7196.54,1786.54 U7.1
HC_RX: R1.1 U9.14 | length 1540.3
  Top Layer w10: R1.1 v1(4245,2455)
  Bottom Layer w10: U9.14 3280,1929.14 3285.86,1935 3375.86,2025 3565,2025 3600,2060 4175,2060 4245,2130 v1(4245,2455)
HC_TX: HC-1.3 U9.15 | length 1089.9
  Top Layer w10: v1(3530,2070) 3720,2070 3755,2105 3755,2275 3835,2355 HC-1.3
  Bottom Layer w10: U9.15 3185,1875 3230,1920 3230,2025 3275,2070 v1(3530,2070)
LCD_EN: LCD1.6 U9.31 | length 2748.5
  Top Layer w10: 1990,2370 2035,2325 2130,2325 U9.31 ; v1(2950,1715) 2995,1715 3030,1750 v1(3030,2045)
  Bottom Layer w10: U9.31 2140,2335 2120,2335 2110,2325 2050,2325 2030,2305 2030,1830 2145,1715 v1(2950,1715) ; v1(3030,2045) 3030,2150 LCD1.6
LCD_Rs: LCD1.4 U9.30 | length 2560.4
  Top Layer w10: 2075,2370 2105,2370 2159.43,2424.43 2230.57,2424.43 U9.30
  Bottom Layer w10: U9.30 2250,2345 2220,2345 2205,2330 2160,2330 2130,2300 2130,1835 2210,1755 3090,1755 3130,1795 3130,2150 LCD1.4
Leg1_fb0: C6.2 J1.1 U1.3 | length 2709.6
  Top Layer w7: U1.3 3180,2350
  Top Layer w10: 3180,2350 3200,2330 3200,2220 3400,2020 4250,2020 4275,1995 4275,1830 4295,1810 4510,1810 4590,1730 v1(4590,1660) ; v1(4590,1385) J1.1 4734.72,1250.28 4780,1205 C6.2
  Bottom Layer w10: v1(4590,1385) v1(4590,1660)
Leg1_fb1: C7.2 J3.1 U1.1 | length 2067
  Top Layer w7: U1.1 3052.24,2310 3120,2310
  Top Layer w10: 3120,2310 3160,2270 3160,2190 3235,2115 3280,2115 3380,2015 3380,1870 3450,1800 3935,1800 3995,1740 v1(3995,1640) ; v1(3995,1385) J3.1 4144.72,1260.28 4195,1210 C7.2
  Bottom Layer w10: v1(3995,1385) v1(3995,1640)
Leg1_fb2: C8.2 J5.1 U1.8 | length 1802.4
  Top Layer w7: 2835,2350 U1.8
  Top Layer w10: 2835,2350 2825,2340 2825,2275 3010,2090 3270,2090 3360,2000 3360,1860 3400,1820 v1(3400,1645) ; v1(3400,1385) J5.1 3549.72,1245 3584.72,1210 C8.2
  Bottom Layer w10: v1(3400,1385) v1(3400,1645)
Leg1_MSel0: U1.7 U9.34 | length 988.4
  Top Layer w7: 2825.32,2369.68 U1.7
  Top Layer w10: 2080,2570 2105,2570 2130,2595 2160,2625 2230,2625 U9.34 ; v1(2775,2400) 2805.32,2369.68 2825.32,2369.68
  Bottom Layer w10: U9.34 2380,2575 2425,2530 2425,2425 2450,2400 v1(2775,2400)
Leg1_MSel1: U1.6 U9.35 | length 1313
  Top Layer w7: 2775,2465 2850,2390 2877.76,2390 U1.6
  Top Layer w10: 1995,2570 2045,2520 2125,2520 U9.35 ; 2775,2465 v1(2775,2535)
  Bottom Layer w10: U9.35 2130,2625 2130,2700 2155,2725 2375,2725 2430,2670 2640,2670 v1(2775,2535)
Leg1_PWM0: J1.2 U2.13 | length 1736.5
  Top Layer w10: J1.2 4833.15,1341.85 4865,1310 4955,1310 4980,1335 4980,1410 5140,1570 5430,1570 5680,1820 5680,2160 5660.39,2179.61 U2.13
Leg1_PWM1: J3.2 U2.14 | length 2098.4
  Top Layer w10: J3.2 4244.53,1383.62 4244.53,1340.47 4270,1315 4355,1315 4395,1355 4395,1405 4420,1430 4945,1430 5130,1615 5410,1615 5640,1845 5640,2035 5595.39,2079.61 U2.14
Leg1_PWM2: J5.2 U2.15 | length 2502.5
  Top Layer w10: J5.2 3655.56,1377.59 3655.56,1349.44 3680,1325 3785,1325 3800,1340 3800,1420 3810,1430 4305,1430 4345,1470 4915,1470 5100,1655 5385,1655 5595,1865 5595,1945 5555,1985 5455.39,1985 U2.15
Leg1_V0: J1.3 U2.29 | length 1510.8
  Top Layer w8: 5390,2130 5595,2130
  Top Layer w10: J1.3 5136.57,1590 5420,1590 5660,1830 5660,2065 5595,2130 ; U2.29 5350,2170 5390,2130
Leg1_V1: J3.3 U2.30 | length 1910.3
  Top Layer w8: 5399.61,2030 5570,2030
  Top Layer w10: J3.3 4381.3,1424.72 4381.3,1426.3 4405,1450 4935,1450 5120,1635 5400,1635 5620,1855 5620,1980 5570,2030 ; U2.30 5399.61,2030
Leg1_V2: J5.3 U2.31 | length 2253.5
  Top Layer w8: 5399.61,1930 5475,1930
  Top Layer w10: J5.3 3745,1386.57 3745,1425 3770,1450 4295,1450 4335,1490 4905,1490 5090,1675 5375,1675 5520,1820 5520,1885 5475,1930 ; U2.31 5399.61,1930
Leg2_fb0: C9.2 J2.1 U3.3 | length 1962.7
  Top Layer w7: U3.3 2780,2350
  Top Layer w10: 2780,2350 2805,2325 2805,2070 2775,2040 2545,2040 2515,2010 2515,1810 2530,1795 2800,1795 2815,1780 v1(2815,1655) ; v1(2815,1390) J2.1 2959.72,1285.28 3020.15,1224.85 3050.03,1224.85 C9.2
  Bottom Layer w10: v1(2815,1390) v1(2815,1655)
Leg2_fb1: C10.2 J4.1 U3.1 | length 1860.9
  Top Layer w7: U3.1 2697.24,2310 2770,2310
  Top Layer w10: v1(2230,1390) J4.1 2373.15,1382.76 2350,1359.61 2350,1253.15 2388.15,1215 2454.88,1215 C10.2 ; v1(2235,1675) 2295,1735 2440,1735 2495,1790 2495,2015 2545,2065 2765,2065 2785,2085 2785,2295 2770,2310
  Bottom Layer w10: v1(2230,1390) 2235,1395 v1(2235,1675)
Leg2_fb2: C11.2 J6.1 U3.8 | length 1811.5
  Top Layer w7: 2425,2350 U3.8
  Top Layer w10: C11.2 1820,1220 1785,1255 1785,1389.72 J6.1 1784.72,1514.72 1855,1585 2115,1585 2180,1650 2180,1720 2215,1755 2345,1755 2415,1825 2415,2340 2425,2350
Leg2_MSel0: U3.7 U9.36 | length 745.4
  Top Layer w7: 2475.32,2369.68 U3.7
  Top Layer w10: 2080,2670 2110.36,2670 2116.21,2675.86 2116.21,2676.21 2165,2725 2235,2725 2280,2680 U9.36 2390,2675 2430,2635 2430,2415 2475.32,2369.68
Leg2_MSel1: U3.6 U9.37 | length 750.5
  Top Layer w7: 2485,2390 2522.76,2390 U3.6
  Top Layer w10: 1995,2670 2040,2625 2130,2625 U9.37 ; v1(2470,2463.98) 2470,2405 2485,2390
  Bottom Layer w10: U9.37 2189.39,2665.61 2224.39,2665.61 2265,2625 2360,2625 2470,2515 v1(2470,2463.98)
Leg2_PWM0: J2.2 U2.9 | length 3896
  Top Layer w10: J2.2 3058.15,1331.85 3080,1310 3160,1310 3205,1355 3205,1410 3265,1470 4285,1470 4325,1510 4905,1510 5180,1785 5180,2185 5230,2235 5555,2235 5665,2345 5665,2640 5625,2680 5450.39,2680 U2.9
Leg2_PWM1: J4.2 U2.10 | length 4289.3
  Top Layer w10: J4.2 2471.57,1343.43 2495,1320 2575,1320 2615,1360 2615,1440 2690,1515 4270,1515 4305,1550 4895,1550 5140,1795 5140,2220 5195,2275 5530,2275 5620,2365 5620,2530 5570,2580 5450.39,2580 U2.10
Leg2_PWM2: J6.2 U2.11 | length 4669.3
  Top Layer w10: J6.2 1883.15,1336.85 1900,1320 1980,1320 2030,1370 2030,1400 2075,1445 2545,1445 2655,1555 4250,1555 4290,1595 4890,1595 5100,1805 5100,2245 5170,2315 5510,2315 5580,2385 5580,2430 5529.61,2480.39 U2.11
Leg2_V0: J2.3 U2.25 | length 3695.5
  Top Layer w8: 5400.39,2630 5610,2630
  Top Layer w10: J2.3 3156.57,1396.57 3255,1495 4280,1495 4315,1530 4900,1530 5160,1790 5160,2200 5215,2255 5540,2255 5640,2355 5640,2600 5610,2630 ; U2.25 5400.39,2630
Leg2_V1: J4.3 U2.26 | length 4139.2
  Top Layer w8: 5400.39,2530 5585,2530
  Top Layer w10: J4.3 2570,1440 2665,1535 4260,1535 4295,1570 4890,1570 5120,1800 5120,2235 5180,2295 5520,2295 5600,2375 5600,2515 5585,2530 ; U2.26 5400.39,2530
Leg2_V2: J6.3 U2.27 | length 4119.1
  Top Layer w8: 5195,2430 5305,2430
  Top Layer w10: J6.3 2056.57,1465 2535,1465 2645,1575 4235,1575 4280,1620 4890,1620 5080,1810 5080,2265 5160,2345 5160,2395 5195,2430 ; 5305,2430 5350,2475 U2.27
Leg3_fb0: C12.2 J7.1 U4.8 | length 2979
  Top Layer w7: U4.8@3061.61,3355 3300,3355
  Top Layer w10: 3300,3355 3405,3460 v1(4115,3460) ; C12.2 4990,4470 5025.28,4434.72 J7.1 5025.28,4080.28 v1(5025,4080)
  Bottom Layer w10: v1(4115,3460) 4115,3845 4200,3930 4935,3930 5025,4020 v1(5025,4080)
Leg3_fb1: C13.2 J9.1 U4.3 | length 2505.3
  Top Layer w7: U4.3 2945,3355
  Top Layer w10: 2945,3355 2955,3365 2955,3380 3015,3440 v1(3310,3440) ; C13.2@4345.12,4460 C13.2 4395,4465 4436.85,4423.15 J9.1 4436.85,4096.85 4435,4095 v1(4435,4090)
  Bottom Layer w10: v1@3300,3440 3345,3485 4050,3485 4090,3525 4090,3850 4330,4090 v1(4435,4090)
Leg3_fb2: C14.2 J11.1 U4.1 | length 1849.7
  Top Layer w7: U4.1 2920.04,3394.37 3030.67,3505
  Top Layer w10: 3030.67,3505 v1(3130,3505) ; C14.2 3815,4470 3855,4430 J11.1 v1(3855,4090)
  Bottom Layer w10: v1@3120,3505 3515,3505 3630,3620 3630,3810 3855,4035 v1(3855,4090)
Leg3_MSel0: U4.7 U9.38 | length 1783.6
  Top Layer w7: U4.7 3179.68,3335.32
  Top Layer w10: 2080,2770 2110,2770 2165,2825 2245,2825 2266.01,2803.99 2266.01,2802.26 2280,2788.27 U9.38 ; 3179.68,3335.32 v1(3220,3295)
  Bottom Layer w10: U9.38 3060,2775 3220,2935 v1(3220,3295)
Leg3_MSel1: U4.6 U9.39 | length 1710
  Top Layer w7: U4.6 3129.37,3315.63
  Top Layer w10: 1995,2770 2045,2720 2125,2720 U9.39 ; 3129.37,3315.63 3155,3290 v1(3155,3250)
  Bottom Layer w10: U9.39 2230,2825 3030,2825 3155,2950 v1(3155,3250)
Leg3_PWM0: J7.2 U2.1 | length 867.6
  Top Layer w10: J7.2 4926.85,4003.15 5065,3865 5364.61,3865 U2.1
Leg3_PWM1: J9.2 U2.2 | length 1475.2
  Top Layer w8: 5130,3730 5405,3730
  Top Layer w10: J9.2 4338.43,4046.57 4495,3890 4970,3890 5130,3730 ; 5405,3730 5450,3685 U2.2
Leg3_PWM2: J11.2 U2.3 | length 2173.3
  Top Layer w8: 5085,3630 5395,3630
  Top Layer w10: J11.2 3756.57,3913.43 3820,3850 4865,3850 5085,3630 ; 5395,3630 5445.39,3579.61 U2.3
Leg3_V0: J7.3 U2.17 | length 831.8
  Top Layer w10: J7.3 4828.43,4061.57 5050,3840 5289.61,3840 U2.17
Leg3_V1: J9.3 U2.18 | length 1459.6
  Top Layer w10: J9.3 4240,4115 4485,3870 4955,3870 5045,3780 v1(5045,3730)
  Bottom Layer w8: v1(5045,3730) 5299.61,3730
  Bottom Layer w10: 5299.61,3730 U2.18
Leg3_V2: J11.3 U2.19 | length 2184.3
  Top Layer w10: J11.3 3658.15,3981.85 3810,3830 4855,3830 4940,3745 4940,3655 4940.04,3654.96 v1(4942.15,3654.96)
  Bottom Layer w8: 5125,3630 5299.61,3630
  Bottom Layer w10: v1(4942.15,3654.96) 5100.04,3654.96 5125,3630 ; 5299.61,3630 U2.19
Leg4_fb0: C15.2 J8.1 U5.8 | length 1613.4
  Top Layer w7: U5.8 2785,3355
  Top Layer w10: 2785,3355 2785,3485 v1(2840,3540) ; C15.2 3210,4470 3250,4430 J8.1 v1(3250,4095)
  Bottom Layer w10: v1(2840,3540) 2850.82,3540 2865.82,3525 3070,3525 3210,3665 3210,3810 3250,3850 v1(3250,4095)
Leg4_fb1: C16.2 J10.1 U5.3 | length 1284.6
  Top Layer w7: U5.3 2580,3355
  Top Layer w10: C16.2@2575.12,4470 C16.2 2630,4475 2665,4440 J10.1 2665,4055 2665.28,4055.28 v1(2665.68,4055.28) ; 2580,3355 2635,3410 v1(2635,3540)
  Bottom Layer w10: v1(2635,3540) 2635,3825 2665.68,3855.68 v1(2665.68,4055.28)
Leg4_fb2: C17.2 J12.1 U5.1 | length 1425.1
  Top Layer w7: 2415.63,3394.37 U5.1
  Top Layer w10: C17.2 2040,4465 2076.85,4428.15 J12.1 2225,4106.85 v1(2225,4050) ; C17.2@1980.12,4515 C17.2@1995.12,4500 ; v1(2395,3475) 2395,3415 2415.63,3394.37
  Bottom Layer w10: v1(2225,4050) 2225,3700 2395,3530 v1(2395,3475)
Leg4_MSel0: U5.7 U9.40 | length 1358.5
  Top Layer w7: U5.7 2764.68,3335.32
  Top Layer w10: 2080,2875 2115,2875 2165,2925 2230,2925 U9.40 2390.93,2875 v1(2391.43,2874.5) ; 2764.68,3335.32 2845,3255 v1(2845,2875)
  Bottom Layer w10: v1(2391.43,2874.5) 2391.68,2874.75 2844.75,2874.75 v1(2845,2875)
Leg4_MSel1: U5.6 U9.41 | length 1318.6
  Top Layer w7: U5.6 2707.24,3315 2750,3315
  Top Layer w10: 1995,2875 2045,2825 2130,2825 U9.41 ; 2750,3315 2800,3265 v1(2800,2930)
  Bottom Layer w10: U9.41 2235,2930 v1(2800,2930)
Leg4_PWM0: J8.2 U2.5 | length 3046.3
  Top Layer w10: J8.2 3151.57,3978.43 3215,3915 3215,3665 3265,3615 4910,3615 5115,3410 5380,3410 5450,3340 U2.5
Leg4_PWM1: J10.2 U2.6 | length 3587.8
  Top Layer w8: 5180,3230 5400,3230
  Top Layer w10: J10.2 2566.57,3983.43 2700,3850 3115,3850 3170,3795 3170,3625 3225,3570 4840,3570 5180,3230 ; 5400,3230 5450,3180 U2.6
Leg4_PWM2: J12.2 U2.7 | length 4106.9
  Top Layer w8: 5035,3130 5399.61,3130
  Top Layer w10: J12.2 1978.43,4001.57 2350,3630 3105,3630 3205,3530 4635,3530 5035,3130 ; 5399.61,3130 U2.7
Leg4_V0: J8.3 U2.21 | length 3013.4
  Top Layer w10: J8.3 3053.15,3996.85 3190,3860 3190,3655 3255,3590 4900,3590 5105,3385 5315,3385 5350,3350 U2.21
Leg4_V1: J10.3 U2.22 | length 3595.7
  Top Layer w10: J10.3 2468.15,4041.85 2680,3830 3105,3830 3135,3800 3135,3630 3215,3550 4810,3550 5055,3305 v1(5055,3230)
  Bottom Layer w8: v1(5055,3230) 5299.61,3230
  Bottom Layer w10: 5299.61,3230 U2.22
Leg4_V2: J12.3 U2.23 | length 4109.3
  Top Layer w8: 5080,3030 5300.39,3030
  Top Layer w10: J12.3 1880,4065 2335,3610 3090,3610 3190,3510 4600,3510 5080,3030 ; 5300.39,3030 U2.23
NetHC-1_4: HC-1.4 R1.2 R2.1 | length 520.7
  Top Layer w10: HC-1.4 3997.99,2455 4025.63,2427.36 4025.63,2389.37 4040,2375 4180,2375 4205,2350 4205,2280 4205.86,2279.14 4205.86,2270.86 4190,2255 R2.1
NetLCD1_3: LCD1.3 R3.1 R4.1 | length 547.4
  Top Layer w10: LCD1.3 3475,2335 3485,2325 3623.58,2325 3667.01,2368.43 R3.1 3709.14,2395 3715,2389.14 3715,2245 3705,2235 R4.1
SCL: J13.4 U2.52 U9.21 | length 5737.2
  Top Layer w10: 2580,1975 U9.21 2635,1820 2870,1820 2894.77,1795.23 v1(2894.77,1656.69) ; U2.52 U2.52@5750,3986.72
  Bottom Layer w10: v1(2894.77,1656.69) 3086.69,1656.69 3135,1705 4230,1705 4285,1760 4285,2015 4465,2195 J13.4 4465,2790 4575,2900 5520,2900 6075,3455 6075,3745 5930,3890 5825,3890 5750,3965 U2.52
SDA: J13.5 U2.51 U9.20 | length 4972
  Top Layer w10: U9.20 2680,1975 ; v1(3075,1800) 3165,1800 3200,1800 v1(3205,1795)
  Bottom Layer w10: U9.20 2755,1800 v1(3075,1800) ; v1(3205,1795) 3211.57,1795 3236.57,1770 4260,1770 4260,2030 4365,2135 J13.5 4365,2745 4585,2965 4915,2965 4975,3025 4975,3260 5085,3370 5545,3370 5591.68,3416.68 5591.68,3921.68 U2.51
pads on no net: J13.2 J13.6 J14.1 J14.2 J14.3 J14.4 J14.5 J14.6 U1.2 U2.4 U2.8 U2.12 U2.16 U2.20 U2.24 U2.28 U2.32 U2.53 U2.55 U2.56 U2.57 U2.58 U2.59 U3.2 U4.2 U5.2 U9.0 U9.1 U9.2 U9.3 U9.4 U9.5 U9.6 U9.7 U9.8 U9.9 U9.10 U9.11 U9.12 U9.13 U9.16 U9.17 U9.18 U9.19 U9.32 U9.33 U9.42 U9.43 U9.44 U9.45 U9.46 U9.47 U9.48 U9.49 U9.50 U9.51 U9.52 U9.53 U9.54 U9.55 U9.56 U9.60 U9.61 U9.62 U9.63 U9.64 U9.65 U9.66 U9.67 U9.72 U9.73 U9.74 U9.75 U9.77 U9.80 U9.81
copper on no net: | length 7506.8
  Top Layer w10: 1990,1875 2045,1820 2065,1820 2125,1820 2180,1875 ; 1990,2470 1995,2470 2040,2425 2130,2425 2180,2475 ; 1995,2975 1995,2960 2025,2930 2135,2930 2180,2975 ; 1995,3075 2045,3025 2100,3025 2130,3025 2180,3075 ; 1995,3175 1995,3170 2035,3130 2135,3130 2180,3175 ; 1995,3275 2045,3225 2115,3225 2130,3225 2180,3275 ; 1995,3375 1995,3360 2025,3330 2135,3330 2180,3375 ; 1995,3475 2040,3430 2135,3430 2180,3475 ; 2075,1875 2080,1875 2125,1920 2235,1920 2280,1875 ; 2075,2470 2105,2470 2155,2520 2235,2520 2280,2475 ; 2080,2975 2115,2975 2125,2985 2160,3020 2235,3020 2280,2975 ; 2080,3075 2115,3075 2160,3120 2235,3120 2280,3075 ; 2080,3175 2120,3175 2130,3185 2130,3195 2155,3220 2240,3220 2280,3180 2280,3175 ; 2080,3275 2085,3270 2124.14,3270 2130,3275.86 2130,3295 2155,3320 2165,3320 2235,3320 2280,3275 ; 2085,3375 2125,3375 2135,3385 2135,3395 2160,3420 2165,3425 2230,3425 2280,3375 ; 2085,3475 2130,3520 2220,3520 2235,3520 2280,3475 ; 2380,3685 2380,3775 ; 2480,3685 2480,3775 ; 2580,3685 2580,3775 ; 2680,3685 2680,3775 ; 2780,1875 2780,1975 ; 2780,3685 2780,3775 ; 2880,1875 2880,1975 ; 2880,3680 2880,3775 ; 2980,1875 2980,1975 ; 2980,3680 2980,3775 ; 3080,1875 3080,1970 ; 3080,3680 3080,3775 ; 3280,3680 3280,3775 ; 3380,3680 3380,3775 ; 3480,1875 3480,1975 ; 3480,3680 3480,3765 3480,3775 ; 3580,1875 3580,1975 ; 3580,3680 3580,3775 ; 3680,1875 3680,1975 ; 3680,3680 3680,3775 ; 3780,1875 3780,1975 ; 3780,3675 3780,3775 ; 3880,1875 3880,1975 ; 3880,3675 3880,3775 ; 3980,1875 3980,1970 ; 3980,3675 3980,3775 ; 4080,1875 4080,1970 ; 4180,1875 4180,1970 ; 4330,1875 4330,1975 ; 4430,1875 4430,1975 ; 4480,3685 4480,3775 ; 4530,1875 4530,1975 ; 4580,3685 4580,3775 ; 4630,1875 4630,1975 ; 4680,3680 4680,3775 ; 4730,1875 4730,1975 ; 4830,1875 4830,1970 ; 5030,1875 5030,1970
  Top Layer w50: 4180,3685 4180,3775

## Polygon pours and split planes (outlines as drawn)
GND on Bottom Layer "GND_L02_P000" (solid, pour order 0): 1535,4520 1665,4650 1665,4655 5250,4655 5260,4645 5260,4025 7740,4025 7740,1675 7745,1670 7665,1590 5255,1590 5240,1575 5260,1555 5260,1025 1770,1025 1550,1245

## Other copper
Multi-Layer:
  region: 3651.58,3195.07 3652.5,3195.07 3652.5,3194.14 3651.58,3194.14
  region: 3700.52,3266.17 3699.59,3266.17 3699.59,3267.09 3700.52,3267.09
  region: 3698.67,3268.02 3699.59,3268.02 3699.59,3267.09 3698.67,3267.09
  region: 3992.32,3279.1 3991.4,3279.1 3991.4,3280.02 3992.32,3280.02
  region: 4029.26,2985.45 4030.18,2985.45 4030.18,2984.53 4029.26,2984.53
  region: 3674.66,3233.85 3675.59,3233.85 3675.59,3232.93 3674.66,3232.93
  region: 4013.56,2974.37 4013.56,2975.29 4014.48,2975.29 4014.48,2974.37
  region: 4020.02,2978.06 4020.02,2977.14 4019.1,2977.14 4019.1,2978.06
  region: 3633.85,3307.97 3633.11,3307.97 3633.11,3308.72 3633.85,3308.72
  region: 3632.36,3309.46 3633.11,3309.46 3633.11,3308.72 3632.36,3308.72
  region: 3868.72,3318.38 3867.97,3318.38 3867.97,3319.12 3868.72,3319.12

## Silkscreen, mask and mechanical layers (free items; w line width, h text height)
Top Overlay:
  drawing of 22 lines, arcs and shapes, not listed
  text "FB Sig V GND" at 2095,4005 h30 r180
  text "FB Sig V GND" at 5055,4000 h30 r180
  text "Leg 4" at 2655,3995.01 h60 r180
  text "Leg 3" at 4445,3990.01 h60 r180
  text "5V GND" at 1540,3940 h30
  text "+Out" at 6345.24,3930 h60 r270
  text "+In" at 7315.24,3900 h60 r270
  text "RAS Quadruped Project" at 3665,3470 h150
  text "Designer: Gabe Donados" at 4540,3385 h60
  text "Version 1" at 4540,3345 h60
  text "Buck Conv" at 6380,2925 h60 r90
  text "PWM Board" at 5745,2590 h60 r90
  text "Vin" at 4745,2470 h20
  text "Leg 2" at 2375,1654.99 h60
  text "Leg 1" at 4140,1654.99 h60
  text "FB Sig V GND" at 4715,1650 h30
  text "FB Sig V GND" at 1765,1640 h30

## Text inside footprints (layer, text, board x,y; h text height)
LCD1: Top Overlay "2" at 3335,2130 h50 r90; Top Overlay "1" at 3435,2140 h50 r90; Top Overlay "15" at 3435,3005 h50 r90; Top Overlay "16" at 3335,3005 h50 r90